# EAGLE board FPGA_ARM (EAGLE 6.4)

No outline drawn. Coordinates in mm, seen from the top.
Copper layers (1*16): Top 0.035mm / dielectric 1.5mm / Bottom 0.035mm
Design rules "default": minimum track width 10mil, minimum drill 24mil, track to track 8mil, track to pad 8mil, pad to pad 8mil, via to via 8mil, smd to smd 8mil, copper to edge 40mil, drill to drill 8mil, minimum pad ring 10mil, minimum via ring 8mil, stop-mask expansion 4mil, vias tented up to drill 0mil, thermal gap 10mil

## Footprints (pad centres in the part's own frame; a part is rotated, then mirrored left to right if it is on the bottom)
VQ100 = smd 1.6 x 0.3: P1 -8.1,6; P2 -8.1,5.5; P3 -8.1,5; P4 -8.1,4.5; P5 -8.1,4; P6 -8.1,3.5; P7 -8.1,3; P8 -8.1,2.5; P9 -8.1,2; P10 -8.1,1.5; P11 -8.1,1; P12 -8.1,0.5; P13 -8.1,0; P14 -8.1,-0.5; P15 -8.1,-1; P16 -8.1,-1.5; P17 -8.1,-2; P18 -8.1,-2.5; P19 -8.1,-3; P20 -8.1,-3.5; P21 -8.1,-4; P22 -8.1,-4.5; P23 -8.1,-5; P24 -8.1,-5.5; P25 -8.1,-6; P51 8.1,-6; P52 8.1,-5.5; P53 8.1,-5; P54 8.1,-4.5; P55 8.1,-4; P56 8.1,-3.5; P57 8.1,-3; P58 8.1,-2.5; P59 8.1,-2; P60 8.1,-1.5; P61 8.1,-1; P62 8.1,-0.5; P63 8.1,0; P64 8.1,0.5; P65 8.1,1; P66 8.1,1.5; P67 8.1,2; P68 8.1,2.5; P69 8.1,3; P70 8.1,3.5; P71 8.1,4; P72 8.1,4.5; P73 8.1,5; P74 8.1,5.5; P75 8.1,6 | smd 0.3 x 1.6: P26 -6,-8.1; P27 -5.5,-8.1; P28 -5,-8.1; P29 -4.5,-8.1; P30 -4,-8.1; P31 -3.5,-8.1; P32 -3,-8.1; P33 -2.5,-8.1; P34 -2,-8.1; P35 -1.5,-8.1; P36 -1,-8.1; P37 -0.5,-8.1; P38 0,-8.1; P39 0.5,-8.1; P40 1,-8.1; P41 1.5,-8.1; P42 2,-8.1; P43 2.5,-8.1; P44 3,-8.1; P45 3.5,-8.1; P46 4,-8.1; P47 4.5,-8.1; P48 5,-8.1; P49 5.5,-8.1; P50 6,-8.1; P76 6,8.1; P77 5.5,8.1; P78 5,8.1; P79 4.5,8.1; P80 4,8.1; P81 3.5,8.1; P82 3,8.1; P83 2.5,8.1; P84 2,8.1; P85 1.5,8.1; P86 1,8.1; P87 0.5,8.1; P88 0,8.1; P89 -0.5,8.1; P90 -1,8.1; P91 -1.5,8.1; P92 -2,8.1; P93 -2.5,8.1; P94 -3,8.1; P95 -3.5,8.1; P96 -4,8.1; P97 -4.5,8.1; P98 -5,8.1; P99 -5.5,8.1; P100 -6,8.1

## Placement (x,y rotation side)
U1  XC3S50AVQ100  [VQ100]  2.54,-13.97 0 top

## Library data of the parts
U1 = xilinx_devices

## Nets
1356_CRYSTAL: U1.P89 U1.P90
ADC1: U1.P27
ADC2: U1.P28
ADC3: U1.P29
ADC4: U1.P30
ADC5: U1.P31
ADC6: U1.P34
ADC7: U1.P35
ADC8: U1.P36
ADC_CLK: U1.P3
ADC_NOE: U1.P4
CROSS_HI: U1.P9
CROSS_LO: U1.P10
DBG: U1.P64
FPGA_CCLK: U1.P53
FPGA_DIN: U1.P51
FPGA_DONE: U1.P54
FPGA_INIT: U1.P48
FPGA_NPROGRAM: U1.P100
FPGA_TCK: U1.P76
FPGA_TDI: U1.P2
FPGA_TDO: U1.P75
FPGA_TMS: U1.P1
GND: U1.P8 U1.P14 U1.P18 U1.P42 U1.P47 U1.P58 U1.P63 U1.P69 U1.P74 U1.P80 U1.P87 U1.P91 U1.P95
MISO: U1.P71
MOSI: U1.P70
NCS: U1.P65
PCK0: U1.P86
PWR_HI: U1.P5
PWR_LO: U1.P6
PWR_OE1: U1.P12
PWR_OE2: U1.P13
PWR_OE3: U1.P15
PWR_OE4: U1.P16
RX: U1.P40
SPCK: U1.P83
SSP_CLK: U1.P62
SSP_DIN: U1.P61
SSP_DOUT: U1.P60
SSP_FRAME: U1.P59
TX: U1.P41
UART_IO1: U1.P43
UART_IO2: U1.P44

## Tracks (layer width: path | path; a pad name or v marks a point on that pad's centre or on a via)
1356_CRYSTAL  (1 unrouted)
GND  (12 unrouted)